# Altium PCB PCBJpepz.PcbDoc
Units mm, origin at the board's own origin, x right, y up, seen from the top; angles counter-clockwise.
Board outline 100 x 100 mm, 2 copper layers (Top Layer, Bottom Layer); 252 components, 165 nets, 710 pads, 0 vias.
Unrouted connection lines stored in the file: 471.
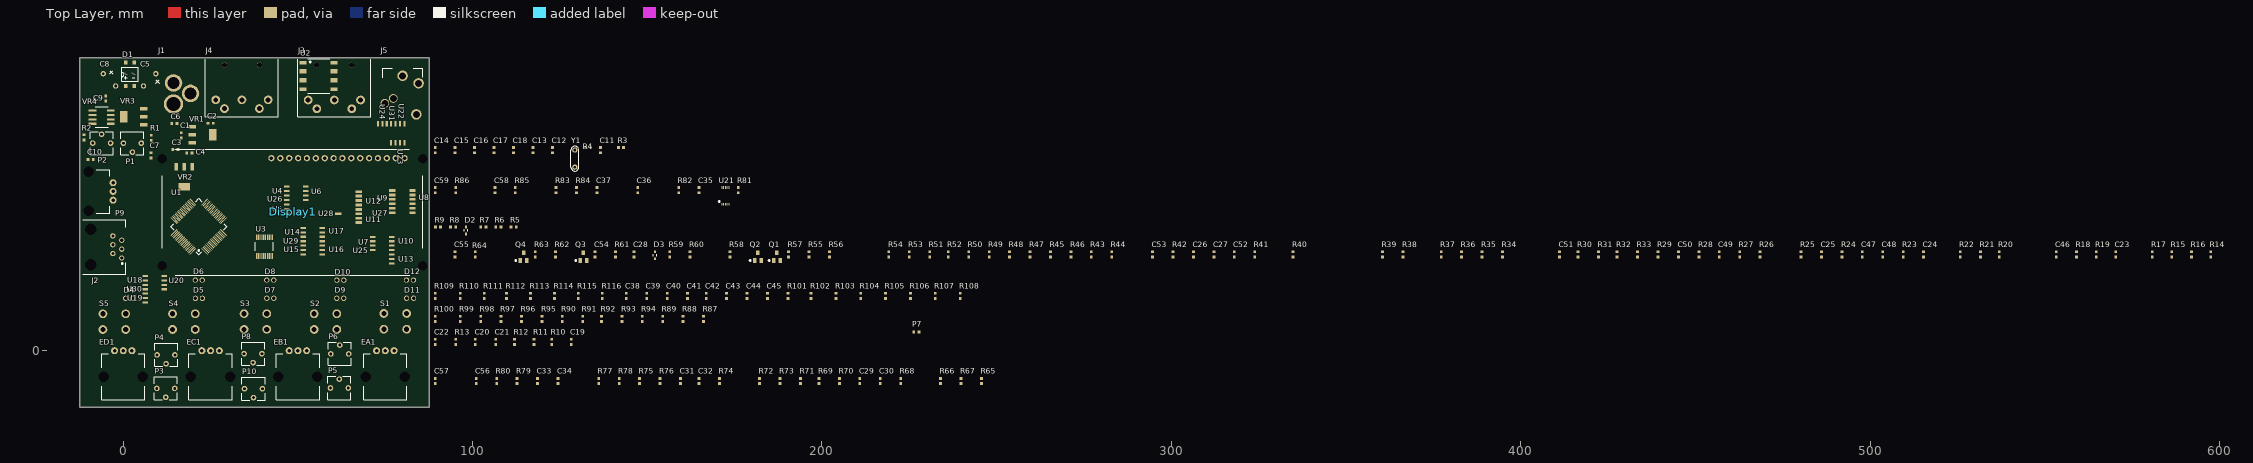
[diagram p0: Top Layer view]
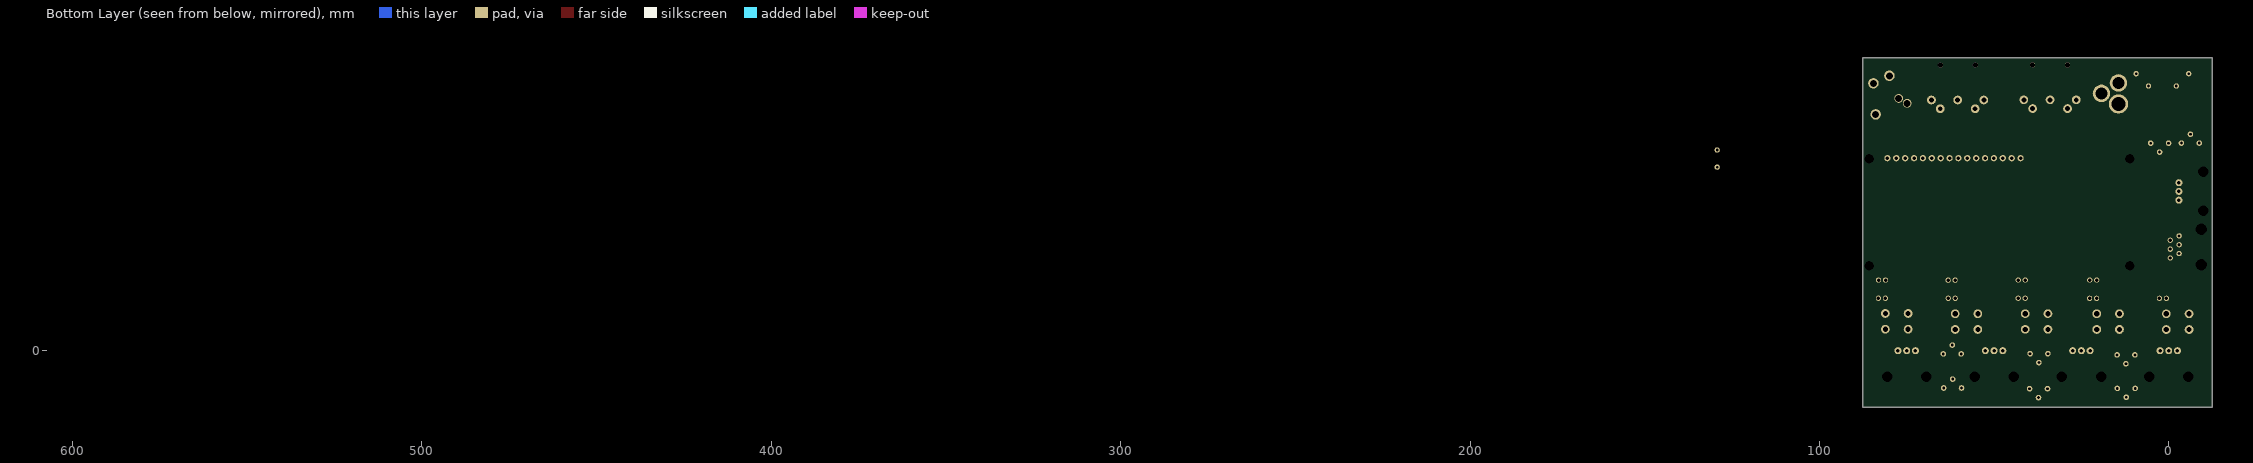
[diagram p1: Bottom Layer view, seen from below]

## Layer stack, top to bottom
Top Solder: solder mask 0.0102, Solder Resist, Dk 3.5
Top Layer: signal copper 0.0356
Dielectric 1: dielectric 0.32, FR-4, Dk 4.8
Bottom Layer: signal copper 0.0356
Bottom Solder: solder mask 0.0102, Solder Resist, Dk 3.5

## Board outline
-12.45,-16.15 -12.45,83.85 87.55,83.85 87.55,-16.15

## Design rules (kind name [scope] priority, off if disabled: settings)
Clearance [All] p1: gap=0.254
PolygonConnect [All] p1: connectstyle=Relief reliefconductorwidth=0.254 reliefentries=4 polygonreliefangle="90 Angle" airgapwidth=0.254
RoutingVias [All] p1: holewidth=0.711 width=1.27 viastyle="Through Hole" minholewidth=0.711 minwidth=1.27 maxholewidth=0.711 maxwidth=1.27
SolderMaskExpansion [All] p1: expansion=0.102
UnpouredPolygon [All] p1: allowunpoured=FALSE
Width [All] p1: maxlimit=0.254 minlimit=0.254 preferedwidth=0.254
29 further rules are at their usual default settings.

## Components (designator, comment, footprint, x,y, rotation, side; value= is the part's Value field where it differs from the comment)
C1 "10uF" CAPC1608N 16.375,63.2 r270 top
C2 "100uF" CAPC1608N 23.45,64.875 r0 top
C3 "10uF" CAPC1608N 13.35,57.4 r0 top
C4 "100uF" CAPC1608N 20.525,56.8 r180 top
C5 "2200uF" "Condo electro 13" 7.575,77.525 r225 top
C6 "10uF" CAPC1608N 16.225,65.25 r180 top
C7 "100uF" CAPC1608N 7.7,57.475 r270 top
C8 "2200uF" "Condo electro 13" -3.95,77.525 r315 top
C9 "10uF" CAPC1608N -5.225,73.775 r270 top
C10 "100uF" CAPC1608N -10.9,54.55 r0 top
C11 "20pF" CAPC1608N 136.832,55.829 r90 top
C12 "20pF" CAPC1608N 123.107,55.829 r90 top
C13 "10uF" CAPC1608N 117.506,55.829 r90 top
C14 "0.1uF" CAPC1608N 89.53,55.829 r90 top
C15 "0.1uF" CAPC1608N 95.13,55.829 r90 top
C16 "0.1uF" CAPC1608N 100.731,55.829 r90 top
C17 "0.1uF" CAPC1608N 106.306,55.829 r90 top
C18 "0.1uF" CAPC1608N 111.906,55.829 r90 top
C19 "10uF" CAPC1608N 128.432,0.951 r90 top
C20 "10uF" CAPC1608N 100.981,0.951 r90 top
C21 "10uF" CAPC1608N 106.831,0.951 r90 top
C22 "0.1uF" CAPC1608N 89.53,0.951 r90 top
C23 "0.1uF" CAPC1608N 570.503,26.002 r90 top
C24 "0.1uF" CAPC1608N 515.501,26.002 r90 top
C25 "22pF" CAPC1608N 486.274,26.002 r90 top
C26 "220pF" CAPC1608N 306.541,26.002 r90 top
C27 "220pF" CAPC1608N 312.366,26.002 r90 top
C28 "100pF" CAPC1608N 146.433,26.002 r90 top
C29 "10uF" CAPC1608N 211.036,-10.25 r90 top
C30 "10uF" CAPC1608N 216.886,-10.25 r90 top
C31 "10uF" CAPC1608N 159.708,-10.25 r90 top
C32 "10uF" CAPC1608N 165.034,-10.25 r90 top
C33 "10uF" CAPC1608N 118.781,-10.25 r90 top
C34 "10uF" CAPC1608N 124.632,-10.25 r90 top
C35 "47pF" CAPC1608N 165.034,44.353 r90 top
C36 "4.7uF" CAPC1608N 147.483,44.353 r90 top
C37 "4.7uF" CAPC1608N 135.807,44.353 r90 top
C38 "Cap" CAPC1608N 144.183,14.101 r90 top
C39 "Cap" CAPC1608N 150.033,14.101 r90 top
C40 "Cap" CAPC1608N 155.883,14.101 r90 top
C41 "Cap" CAPC1608N 161.733,14.101 r90 top
C42 "Cap" CAPC1608N 167.059,14.101 r90 top
C43 "Cap" CAPC1608N 172.909,14.101 r90 top
C44 "Cap" CAPC1608N 178.759,14.101 r90 top
C45 "Cap" CAPC1608N 184.61,14.101 r90 top
C46 "5uF" CAPC1608N 553.478,26.002 r90 top
C47 "5uF" CAPC1608N 497.975,26.002 r90 top
C48 "5uF" CAPC1608N 503.825,26.002 r90 top
C49 "5uF" CAPC1608N 457.048,26.002 r90 top
C50 "5uF" CAPC1608N 445.347,26.002 r90 top
C51 "5uF" CAPC1608N 411.271,26.002 r90 top
C52 "5uF" CAPC1608N 318.216,26.002 r90 top
C53 "5uF" CAPC1608N 294.84,26.002 r90 top
C54 "5uF" CAPC1608N 135.232,26.002 r90 top
C55 "5uF" CAPC1608N 95.13,26.002 r90 top
C56 "5uF" CAPC1608N 101.231,-10.25 r90 top
C57 "5uF" CAPC1608N 89.53,-10.25 r90 top
C58 "5uF" CAPC1608N 106.581,44.353 r90 top
C59 "5uF" CAPC1608N 89.53,44.353 r90 top
D1 "MB8S" MB8S 1.954,75.734 r0 top
D2 "1N914" 1N914 99.005,32.027 r0 top
D3 "1N914" 1N914 153.108,24.927 r0 top
D4 "LED0" LED -0.6,14.1 r0 top
D5 "LED1" LED 19.375,14.1 r0 top
D6 "LED2" LED 19.35,19.325 r0 top
D7 "LED3" LED 39.825,14.125 r0 top
D8 "LED4" LED 39.8,19.325 r0 top
D9 "LED5" LED 59.85,14.1 r0 top
D10 "LED6" LED 59.875,19.3 r0 top
D11 "LED7" LED 79.825,14.125 r0 top
D12 "LED8" LED 79.8,19.325 r0 top
Display1 "16x2 LCD" Display 6.1,16.625 r0 top
EA1 "EC12E" EC12E 75,0 r180 top
EB1 "EC12E" EC12E 50,0 r180 top
EC1 "EC12E" EC12E 25,0 r180 top
ED1 "EC12E" EC12E 0,0 r180 top
J1 "12V AC IN" "NEB 21 R" 21.3,67.175 r90 top
J2 "Program/Debug" RJ11 2.825,18.5 r90 top
J3 "Midi IN" "SOCKET MIDI" 42,66.675 r0 top
J4 "Midi THRU" "SOCKET MIDI" 15.55,66.725 r0 top
J5 "Audio Out" "1503 09" 70.3,66.625 r0 top
P1 "9V ADJ" "BOURNS Trim pot" 2.625,59.4 r0 top
P2 "-9V ADJ" "BOURNS Trim pot" -6.201,59.423 r180 top
P3 "Initial Reso" "BOURNS Trim pot" 12.175,-10.775 r0 top
P4 "V/Oct Trim" "BOURNS Trim pot" 12.25,-1.2 r0 top
P5 "Initial Freq" "BOURNS Trim pot" 61.85,-10.675 r180 top
P6 "Hi compensate" "BOURNS Trim pot" 61.95,-0.925 r180 top
P7 "Mod amount" CAPC1608N 225.4,5.175 r0 top
P8 "Output trim" "BOURNS Trim pot" 37.15,-0.85 r0 top
P9 "Volume" "ALPS Potentiometer" -9.375,45.2 r90 top
P10 "1K lin" "BOURNS Trim pot" 37.275,-10.875 r0 top
Q1 "2N3906" 2N3906 181.834,22.777 r0 top
Q2 "2N3906" 2N3906 176.384,22.777 r0 top
Q3 "2N3904" 2N3906 126.457,22.777 r0 top
Q4 "2N3904" 2N3906 109.306,22.777 r0 top
R1 "120" CAPC1608N 7.825,62.525 r270 top
R2 "240" CAPC1608N -11.05,59.45 r90 top
R3 "10k" CAPC1608N 140.882,57.954 r0 top
R4 "10" CAPC1608N 131.457,57.954 r0 top
R5 "Res1" CAPC1608N 110.131,35.228 r0 top
R6 "Res1" CAPC1608N 105.806,35.228 r0 top
R7 "330" CAPC1608N 101.481,35.228 r0 top
R8 "Res1" CAPC1608N 92.83,35.228 r0 top
R9 "1k" CAPC1608N 88.505,35.228 r0 top
R10 "100" CAPC1608N 122.832,0.951 r90 top
R11 "100" CAPC1608N 117.756,0.951 r90 top
R12 "100" CAPC1608N 112.156,0.951 r90 top
R13 "100" CAPC1608N 95.38,0.951 r90 top
R14 "300k" CAPC1608N 597.73,26.002 r90 top
R15 "2k" CAPC1608N 586.554,26.002 r90 top
R16 "2k" CAPC1608N 592.154,26.002 r90 top
R17 "200k" CAPC1608N 580.954,26.002 r90 top
R18 "100k" CAPC1608N 559.303,26.002 r90 top
R19 "100k" CAPC1608N 564.903,26.002 r90 top
R20 "49.9k" CAPC1608N 537.152,26.002 r90 top
R21 "150k" CAPC1608N 531.827,26.002 r90 top
R22 "4.7M" CAPC1608N 525.976,26.002 r90 top
R23 "2k" CAPC1608N 509.675,26.002 r90 top
R24 "180k" CAPC1608N 492.125,26.002 r90 top
R25 "4.7M" CAPC1608N 480.424,26.002 r90 top
R26 "150k" CAPC1608N 468.723,26.002 r90 top
R27 "39k" CAPC1608N 462.898,26.002 r90 top
R28 "300k" CAPC1608N 451.198,26.002 r90 top
R29 "49.9k" CAPC1608N 439.497,26.002 r90 top
R30 "39k" CAPC1608N 416.621,26.002 r90 top
R31 "100" CAPC1608N 422.471,26.002 r90 top
R32 "100" CAPC1608N 427.796,26.002 r90 top
R33 "43k" CAPC1608N 433.647,26.002 r90 top
R34 "150k" CAPC1608N 394.97,26.002 r90 top
R35 "30k" CAPC1608N 389.12,26.002 r90 top
R36 "100k" CAPC1608N 383.269,26.002 r90 top
R37 "100k" CAPC1608N 377.444,26.002 r90 top
R38 "20k" CAPC1608N 366.493,26.002 r90 top
R39 "20k" CAPC1608N 360.643,26.002 r90 top
R40 "4.7k" CAPC1608N 334.992,26.002 r90 top
R41 "100" CAPC1608N 324.066,26.002 r90 top
R42 "30k" CAPC1608N 300.69,26.002 r90 top
R43 "50k" CAPC1608N 277.289,26.002 r90 top
R44 "50k" CAPC1608N 283.139,26.002 r90 top
R45 "100k" CAPC1608N 265.614,26.002 r90 top
R46 "120k" CAPC1608N 271.439,26.002 r90 top
R47 "30k" CAPC1608N 259.763,26.002 r90 top
R48 "100k" CAPC1608N 253.913,26.002 r90 top
R49 "100k" CAPC1608N 248.063,26.002 r90 top
R50 "100k" CAPC1608N 242.212,26.002 r90 top
R51 "7.5k" CAPC1608N 231.037,26.002 r90 top
R52 "7.5k" CAPC1608N 236.362,26.002 r90 top
R53 "2k" CAPC1608N 225.187,26.002 r90 top
R54 "100k" CAPC1608N 219.336,26.002 r90 top
R55 "100k" CAPC1608N 196.46,26.002 r90 top
R56 "30k" CAPC1608N 202.31,26.002 r90 top
R57 "1M" CAPC1608N 190.61,26.002 r90 top
R58 "100k" CAPC1608N 173.884,26.002 r90 top
R59 "33k" CAPC1608N 156.608,26.002 r90 top
R60 "33k" CAPC1608N 162.459,26.002 r90 top
R61 "10k" CAPC1608N 141.082,26.002 r90 top
R62 "100k" CAPC1608N 123.957,26.002 r90 top
R63 "475" CAPC1608N 118.106,26.002 r90 top
R64 "10k" CAPC1608N 100.981,26.002 r90 top
R65 "18K" CAPC1608N 245.863,-10.25 r90 top
R66 "2k" CAPC1608N 234.162,-10.25 r90 top
R67 "2k" CAPC1608N 240.012,-10.25 r90 top
R68 "3.3k" CAPC1608N 222.736,-10.25 r90 top
R69 "10k" CAPC1608N 199.36,-10.25 r90 top
R70 "10k" CAPC1608N 205.186,-10.25 r90 top
R71 "18K" CAPC1608N 194.01,-10.25 r90 top
R72 "2k" CAPC1608N 182.309,-10.25 r90 top
R73 "2k" CAPC1608N 188.16,-10.25 r90 top
R74 "3.3k" CAPC1608N 170.884,-10.25 r90 top
R75 "10k" CAPC1608N 148.008,-10.25 r90 top
R76 "10k" CAPC1608N 153.858,-10.25 r90 top
R77 "2k" CAPC1608N 136.307,-10.25 r90 top
R78 "2k" CAPC1608N 142.158,-10.25 r90 top
R79 "10k" CAPC1608N 112.931,-10.25 r90 top
R80 "10k" CAPC1608N 107.081,-10.25 r90 top
R81 "50k" CAPC1608N 176.209,44.353 r90 top
R82 "10k" CAPC1608N 159.183,44.353 r90 top
R83 "330" CAPC1608N 124.107,44.353 r90 top
R84 "5k" CAPC1608N 129.957,44.353 r90 top
R85 "10k" CAPC1608N 112.431,44.353 r90 top
R86 "10k" CAPC1608N 95.38,44.353 r90 top
R87 "220" CAPC1608N 166.309,7.526 r90 top
R88 "220" CAPC1608N 160.458,7.526 r90 top
R89 "220" CAPC1608N 154.608,7.526 r90 top
R90 "10K" CAPC1608N 125.882,7.526 r90 top
R91 "10K" CAPC1608N 131.732,7.526 r90 top
R92 "10K" CAPC1608N 137.082,7.526 r90 top
R93 "10K" CAPC1608N 142.933,7.526 r90 top
R94 "10K" CAPC1608N 148.758,7.526 r90 top
R95 "220" CAPC1608N 120.031,7.526 r90 top
R96 "220" CAPC1608N 114.206,7.526 r90 top
R97 "220" CAPC1608N 108.356,7.526 r90 top
R98 "220" CAPC1608N 102.506,7.526 r90 top
R99 "220" CAPC1608N 96.655,7.526 r90 top
R100 "220" CAPC1608N 89.53,7.526 r90 top
R101 "10K" CAPC1608N 190.46,14.101 r90 top
R102 "10K" CAPC1608N 197.06,14.101 r90 top
R103 "10K" CAPC1608N 204.186,14.101 r90 top
R104 "10K" CAPC1608N 211.286,14.101 r90 top
R105 "10K" CAPC1608N 218.411,14.101 r90 top
R106 "10K" CAPC1608N 225.537,14.101 r90 top
R107 "10K" CAPC1608N 232.637,14.101 r90 top
R108 "10K" CAPC1608N 239.762,14.101 r90 top
R109 "330" CAPC1608N 89.53,14.101 r90 top
R110 "330" CAPC1608N 96.655,14.101 r90 top
R111 "330" CAPC1608N 103.506,14.101 r90 top
R112 "330" CAPC1608N 109.881,14.101 r90 top
R113 "330" CAPC1608N 116.731,14.101 r90 top
R114 "330" CAPC1608N 123.607,14.101 r90 top
R115 "330" CAPC1608N 130.457,14.101 r90 top
R116 "330" CAPC1608N 137.332,14.101 r90 top
S1 "BUT0" "PUSH BUTTON" 72.7,4.125 r0 top
S2 "BUT1" "PUSH BUTTON" 52.725,4.05 r0 top
S3 "BUT2" "PUSH BUTTON" 32.675,4.075 r0 top
S4 "BUT3" "PUSH BUTTON" 12.2,4.05 r0 top
S5 "BUT4" "PUSH BUTTON" -7.725,4.025 r0 top
U1 "PIC32MX575F512H" PIC32 21.6,27.45 r135 top
U2 "6N139" 6N139 49.95,83.625 r270 top
U3 "PCM1781" PCM1781 40.825,31.1 r0 top
U4 "TL084" TL084_3PADS 47.791,42.246 r90 top
U5 "TL084" TL084_3PADS 47.791,37.166 r90 top
U6 "TL084" TL084_3PADS 53.191,42.246 r90 top
U7 "TL084" TL084_3PADS 72.465,27.902 r90 top
U8 "LM13700" LM13700_5PADS 80.135,42.056 r90 top
U9 "LM13700" LM13700_5PADS 74.335,42.056 r90 top
U10 "TL084" TL084_3PADS 77.865,27.902 r90 top
U11 "LM13700" LM13700_2PADS 70.044,36.671 r270 top
U12 "LM13700" LM13700_5PADS 64.71,41.715 r90 top
U13 "TL084" TL084_3PADS 77.865,22.822 r90 top
U14 "TL084" TL084_3PADS 52.561,30.452 r90 top
U15 "TL084" TL084_3PADS 52.561,25.372 r90 top
U16 "TL084" TL084_3PADS 57.961,25.372 r90 top
U17 "TL084" TL084_3PADS 57.961,30.452 r90 top
U18 "TL084" TL084_3PADS 7.35,16.7 r90 top
U19 "TL084" TL084_3PADS 7.35,11.62 r90 top
U20 "TL084" TL084_3PADS 12.75,16.7 r90 top
U21 "ADG704" ADG704 169.684,40.253 r0 top
U22 "TL084" TL084_3PADS 75.8,63.9 r0 top
U23 "TL084" TL084_3PADS 75.8,58.5 r0 top
U24 "TL084" TL084_3PADS 70.72,63.9 r0 top
U25 "TL084" TL084_ALIM 75.325,24.6 r90 top
U26 "TL084" TL084_ALIM 50.651,38.944 r90 top
U27 "LM13700" LM13700_ALIM 82.675,37.23 r90 top
U28 "LM13700" LM13700_ALIM 67.25,36.925 r90 top
U29 "TL084" TL084_ALIM 55.421,27.15 r90 top
U30 "TL084" TL084_ALIM 10.21,13.398 r90 top
U31 "TL084" TL084_ALIM 72.498,61.04 r0 top
VR1 "LM1117-3.3" LM1117-SOT 25.592,61.849 r270 top
VR2 "LM1117-5.0" LM1117-SOT 17.475,46.9 r180 top
VR3 "LM1117-ADJ" LM1117-SOT 0.075,66.975 r90 top
VR4 "LM337L" LM337L -3.6,67.5 r270 top
Y1 "12.288 MHz" Xtal 129.257,52.553 r90 top

## Footprints (in the part's own frame and the unit in brackets; to place one, negate y for a bottom-side part, rotate by r counter-clockwise, add the part's x,y. Pads: shape width x height; smd on the part's side, far side on the other; paste and mask are expansions set on the pad)
1N914 [mm] "Diode"
  rect 0.5x0.8 smd: 1(-0.889,3.396) 2(-0.889,1.396)
  silkscreen extent -1.4,2.16 -0.38,2.67
2N3906 [mm]
  rect 1x1.4 smd: 1(6.218,3.048) 2(4.318,3.048) 3(5.268,5.248)
  silkscreen extent 2.85,2.85 3.25,3.25
6N139 [mil] "Optocoupleur"
  rect 40x78.74 smd: 1(45,60) 4(345,60) 5(345,409.13) 8(45,409.13)
  rect 50x78.74 smd: 2(145,60) 3(245,60) 6(245,409.13) 7(145,409.13)
  silkscreen extent 0,110 390,360
"1503 09" [mm] "Fiche JACK"
  round 3 hole 2 unplated: 1(9.652,12.065) 2(14.224,9.906) 4(13.589,1.016)
  round 2.5 hole 2 unplated: 3(4.572,4.191) 5(6.985,5.588)
  silkscreen extent 3.95,11.57 15.45,14.17
ADG704 [mm] "Multiplexeur"
  rect 0.3x0.8 smd mask+0.05: 1(1.651,1.651) 2(2.151,1.651) 3(2.659,1.651) 4(3.159,1.651) 5(3.675,1.651) 6(3.675,6.498) 7(3.159,6.498) 8(2.659,6.498) 9(2.151,6.498) 10(1.651,6.498)
  silkscreen extent 0.69,2.21 1.09,2.61
"ALPS Potentiometer" [mm] "Encodeur"
  round 0 hole 3 mask+0: 0(-5.207,0.531) 0(6.005,0.531)
  round 2 hole 1 mask+0: 1(2.877,-6.469) 2(-2.123,-6.469) 3(0.377,-6.469)
  silkscreen extent -5.82,-5.58 6.58,-1.64
"BOURNS Trim pot" [mm]
  round 1.6 hole 0.8: 1(-2.57,0) 2(2.54,0) 3(0,-2.54)
  silkscreen extent -3.3,-3.3 3.3,3.3
CAPC1608N [mm]
  rect 0.8x0.8 smd: 1(0.838,0.203) 2(2.337,0.203)
"Condo electro 13" [mil]
  round 60 hole 30: 1(-98.43,0) 2(98.43,0)
  silkscreen extent -73,50 -23,100
Display [mm]
  round 0 hole 2.7 mask+0: 0(5.073,7.681) 0(5.073,38.288) 0(79.622,7.681) 0(79.622,38.288)
  round 1.8 hole 1: 1(74.422,38.481) 2(71.882,38.481) 3(69.342,38.481) 4(66.802,38.481) 5(64.262,38.481) 6(61.722,38.481) 7(59.182,38.481) 8(56.642,38.481) 9(54.102,38.481) 10(51.562,38.481) 11(49.022,38.481) 12(46.482,38.481) 13(43.942,38.481) 14(41.402,38.481) 15(38.862,38.481) 16(36.322,38.481)
  silkscreen extent 5.08,4.95 79.63,41.08
EC12E [mm] "Encodeur"
  round 0 hole 3 mask+0: 0(-5.584,7.5) 0(5.628,7.493)
  round 2 hole 1 mask+0: 1(2.5,0) 2(-2.5,0) 3(0,0)
  silkscreen extent -6.2,0.89 6.2,14.09
LED [mm]
  round 1.5 hole 1: 1(3.27,0.889) 2(1.27,0.889)
LM337L [mm]
  rect 0.6x2.2 smd mask+0.1: 1(0,0) 1(0,-5.2) 1(1.27,0) 1(1.27,-5.2) 2(2.54,-5.2) 3(-1.27,-5.2) ""(-1.27,0) ""(2.54,0)
  round 0.4 on Top Overlay: ""(-1.524,-3.549)
  silkscreen extent -2.29,-4.44 3.56,-0.75
LM1117-SOT [mm]
  rect 1x2.15 smd: 1(2.3,-5.8) 2(-2.3,-5.8) 3(0,-5.8)
  rect 3.25x2.15 smd: 3(0,0)
LM13700_2PADS [mm]
  rect 0.8x1.8 smd: 1(-1.27,-2.667) 2(0,-2.667)
LM13700_5PADS [mm]
  rect 0.8x1.8 smd: 1(-1.27,-2.667) 2(0,-2.667) 3(1.27,-2.667) 4(2.54,-2.667) 5(3.81,-2.667)
LM13700_ALIM [mm]
  rect 0.8x1.8 smd: 1(2.286,5.673) 2(2.286,-0.127)
MB8S [mm]
  rect 1x1.2 smd: 1(-1.25,6.8) 2(1.25,6.8) 3(1.25,0) 4(-1.25,0)
  silkscreen extent -2.35,1.4 2.35,5.4
"NEB 21 R" [mm] "Fiche Alimentation"
  round 5.5 hole 4 unplated: 1(3.458,6.911)
  round 5 hole 3.5 unplated: 2(6.477,2.032) 3(9.458,6.911)
PCM1781 [mm] "DAC"
  rect 0.4x1.6 smd mask+0.05: 1(-2.667,-4.003) 2(-2.032,-4.003) 3(-1.397,-4.003) 4(-0.762,-4.003) 5(-0.127,-4.003) 6(0.508,-4.003) 7(1.143,-4.003) 8(1.778,-4.003) 9(1.778,1.397) 10(1.143,1.397) 11(0.508,1.397) 12(-0.127,1.397) 13(-0.762,1.397) 14(-1.397,1.397) 15(-2.032,1.397) 16(-2.667,1.397)
  round 0.4 on Top Overlay: 1(-2.413,-2.286)
  silkscreen extent -3.05,-2.54 2.16,0
PIC32 [mm] "PIC32MX575F512H"
  rect 2.5x0.3 smd paste+0 mask+0.05: 1(-0.5,-1.905) 2(-0.5,-2.405) 3(-0.5,-2.913) 4(-0.5,-3.413) 5(-0.5,-3.929) 6(-0.5,-4.429) 7(-0.5,-4.945) 8(-0.5,-5.445) 9(-0.5,-5.961) 10(-0.5,-6.461) 11(-0.5,-6.969) 12(-0.5,-7.469) 13(-0.5,-7.985) 14(-0.5,-8.485) 15(-0.5,-9.001) 16(-0.5,-9.501) 33(11.9,-9.501) 34(11.9,-9.001) 35(11.9,-8.485) 36(11.9,-7.985) 37(11.9,-7.469) 38(11.9,-6.969) 39(11.9,-6.461) 40(11.9,-5.961) 41(11.9,-5.445) 42(11.9,-4.945) 43(11.9,-4.429) 44(11.9,-3.929) 45(11.9,-3.413) 46(11.9,-2.913) 47(11.9,-2.405) 48(11.9,-1.905)
  rect 0.3x2.5 smd paste+0 mask+0.05: 17(1.905,-11.9) 18(2.405,-11.9) 19(2.913,-11.9) 20(3.413,-11.9) 21(3.929,-11.9) 22(4.429,-11.9) 23(4.945,-11.9) 24(5.445,-11.9) 25(5.961,-11.9) 26(6.461,-11.9) 27(6.969,-11.9) 28(7.469,-11.9) 29(7.985,-11.9) 30(8.485,-11.9) 31(9.001,-11.9) 32(9.501,-11.9) 49(9.501,0.5) 50(9.001,0.5) 51(8.485,0.5) 52(7.985,0.5) 53(7.469,0.5) 54(6.969,0.5) 55(6.461,0.5) 56(5.961,0.5) 57(5.445,0.5) 58(4.945,0.5) 59(4.429,0.5) 60(3.929,0.5) 61(3.413,0.5) 62(2.913,0.5) 63(2.405,0.5) 64(1.905,0.5)
  silkscreen extent 0,-11.4 11.4,0
"PUSH BUTTON" [mm]
  round 2.5 hole 1.5: 1(8.405,6.532) 2(1.905,6.532) 3(1.905,2.032) 4(8.405,2.032)
RJ11 [mm] "RJ11 Socket"
  round 0 hole 3.25 mask+0: 0(6.11,12.159) 0(16.27,12.159)
  round 1.5 hole 0.9: 1(8.025,3.269) 2(9.295,5.809) 3(10.565,3.269) 4(11.835,5.809) 5(13.105,3.269) 6(14.375,5.809)
  silkscreen extent 3.34,2.16 19.04,14.35
"SOCKET MIDI" [mm] "Midi"
  round 1.4 hole 1.5 mask+0: 0(13.415,15.08) 0(23.415,15.08)
  round 2.5 hole 1.4: 1(18.415,5.08) 2(10.922,5.08) 3(25.922,5.08) 4(13.415,2.58) 5(23.415,2.58)
  silkscreen extent 7.87,0.25 28.83,16.76
TL084_3PADS [mm] "Ampli-op"
  rect 0.6x1.55 smd: 1(2.159,1.016) 2(3.429,1.016) 3(4.699,1.016)
TL084_ALIM [mm] "Ampli-op"
  rect 0.6x1.55 smd: 1(4.191,3.876) 2(4.191,-1.524)
Xtal [mil]
  round 60 hole 30: 1(0,0) 2(192.13,0)
  silkscreen extent -45,-45 235,45

## Part data
C1 C2 C3 C4 C6 C7 C9 C10: library part Cap2, "Capacitor"
C5 C8 C19 C20 C21: library part "Cap Pol1", "Polarized Capacitor (Radial)"
C11 C12 C14 C15 C16 C17 C18 C22 C23 C24 C25 C26 C27 C28 C29 C30 C31 C32 C33 C34 C35 C36 C37 C46 C47 C48 C49 C50 C51 C52 C53 C54 C55 C56 C57 C58 C59: library part "Cap Semi", "Capacitor (Semiconductor SIM Model)"
C13: library part Cap, "Capacitor"
C38 C39 C40 C41 C42 C43 C44 C45: "Capacitor"
D1: library part Bridge1, "Full Wave Diode Bridge"
D2: library part Diode, "Default Diode"
D3: library part "Diode 1N4001", "1 Amp General Purpose Rectifier"
D4: "Typical INFRARED GaAs LED"
D5 D6 D7 D8 D9 D10 D11 D12: library part LED0, "Typical INFRARED GaAs LED"
Display1: library part Display
J1: library part "Header 3", "Header, 3-Pin"
J2: library part "Header 6H", "Header, 6-Pin, Right Angle"
J3 J4: library part "Header 5", "DIN 5 Pins"
J5: library part "Phonejack Stereo SW", "3-Conductor Jack with 2 break contacts (normals) and 2 auxiliary make contacts"
P1 P2 P3 P4 P5 P6 P8 P9 P10: library part RPot, "Potentiometer"
P7: library part "Res Adj1", "Variable Resistor"
Q1 Q2: "PNP General Purpose Amplifier"
Q3 Q4: "NPN General Purpose Amplifier"
R1 R2 R10 R11 R12 R13 R14 R15 R16 R17 R18 R19 R20 R21 R22 R23 R24 R25 R26 R27 R28 R29 R30 R31 R32 R33 R34 R35 R36 R37 R38 R39 R40 R41 R42 R43 R44 R45 R46 R47 R48 R49 R50 R51 R52 R53 R54 R55 R56 R57 R58 R59 R60 R61 R62 R63 R64 R65 R66 R67 R68 R69 R70 R71 R72 R73 R74 R75 R76 R77 R78 R79 R80 R81 R82 R83 R84 R85 R86: library part Res3, "Resistor"
R3 R4 R7 R9 R87 R88 R89 R90 R91 R92 R93 R94 R95 R96 R97 R98 R99 R100 R101 R102 R103 R104 R105 R106 R107 R108 R109 R110 R111 R112 R113 R114 R115 R116: library part Res1, "Resistor"
R5 R6 R8: "Resistor"
S1 S2 S3 S4 S5: library part SW-PB, "Switch"
U1: library part "PIC32 MX575F512H"
U2: library part Optocoupleur
U3: library part "PCM1781 DAC"
U8 U9 U12: library part LM13700_2
U11: library part LM13700_1
U25 U26 U29 U30 U31: library part TL_CLEAN
VR1 VR2 VR3 VR4: library part "Volt Reg", "Voltage Regulator"
Y1: library part XTAL, "Crystal Oscillator"

## Nets (pads, with @x,y where several pads share a name; then routed paths per layer and width w, separated by ;. In a path a pad name is that pad's centre, name@x,y a point inside that pad or via, vN(x,y) a via of type N, cw(c..) or ccw(c..) an arc to the next point about the centre after c; other vN are vias at no path point)
3,3V: C14.2 C15.2 C16.2 C17.2 C18.2 J2.2 R3.2 R4.1 R4.2 U1.10 U1.19 U1.26 U1.38 U1.57
+3.3V: C2.1 R90.2 R91.2 R92.2 R93.2 R94.2 VR1.3
+5V: C4.1 C21.1 C22.2 Display1.2 Display1.16 P10.2 R5.2 R7.2 U2.8 U3.11 U21.5 U21.6 VR2.3
+9V: C7.1 C46.1 C47.1 C50.1 C52.1 C54.1 C56.1 C58.1 R1.2 R38.1 R39.1 R44.2 R57.1 R60.2 U25.2 U26.2 U27.1 U28.1 U29.2 U30.2 U31.2 VR3.3
-9V: C10.2 C48.2 C49.2 C51.2 C53.2 C55.2 C57.2 C59.2 R2.1 R30.2 R33.2 R40.1 R43.1 R55.1 R59.1 R65.1 R71.1 U25.1 U26.1 U29.1 U30.1 U31.1 VR4.3
GND: C1.2 C2.2 C3.2 C4.2 C5.2 C6.2 C7.2 C8.1 C9.1 C10.1 C11.1 C12.1 C13.1 C14.1 C15.1 C16.1 C17.1 C18.1 C26.1 C27.1 C29.1 C30.1 C31.1 C32.1 C33.1 C34.1 C38.1 C39.1 C40.1 C41.1 C42.1 C43.1 C44.1 C45.1 C46.2 C47.2 C48.1 C49.1 C50.2 C51.1 C52.2 C53.1 C54.2 C55.1 C56.2 C57.1 C58.2 C59.1 D4.2 D5.2 D6.2 D7.2 D8.2 D9.2 D10.2 D11.2 D12.2 Display1.1 Display1.5 EA1.3 EB1.3 EC1.3 ED1.3 J1.2 J2.3 J4.2 J5.1 P1.1 P1.3 P2.2 P2.3 P9.1 Q1.1 Q2.1 Q3.2 R9.1 R22.2 R24.2 R25.2 R27.2 R31.2 R32.2 R41.2 R42.2 R56.2 R63.2 R69.2 R75.2 R80.2 R86.2 S1.2 S2.2 S3.2 S4.2 S5.2 U1.9 U1.20 U1.25 U1.41 U2.5 U5.2 U7.3 U8.3 U9.3 U12.3 U14.3 U16.3 U17.3 U21.3 U22.2 U23.2 VR1.2 VR2.2
NetC1_1: C1.1 C3.1 C5.1 C6.1 D1.4 VR1.1 VR2.1 VR3.1
NetC8_2: C8.2 C9.2 D1.3 VR4.1
NetC11_2: C11.2 U1.40 Y1.2
NetC12_2: C12.2 U1.39 Y1.1
NetC13_2: C13.2 U1.56
NetC19_1: C19.1 U3.15
NetC19_2: C19.2 R17.1 U21.2
NetC20_1: C20.1 U3.13
NetC23_1: C23.1 R19.2 R36.2 U13.1 U13.2
NetC23_2: C23.2 R22.1 U4.3
NetC24_1: C24.1 R20.2 R37.1 U10.1 U10.2
NetC24_2: C24.2 R25.1 U6.3
NetC25_1: C25.1 R21.1 R24.1 U4.2
NetC25_2: C25.2 R16.1 R21.2 R29.2 U4.1
NetC26_2: C26.2 U9.5 U10.3
NetC27_2: C27.2 U8.5 U13.3
NetC28_1: C28.1 Q4.3 R57.2 U17.2
NetC28_2: C28.2 P6.2 P6.3 R64.1 U17.1
NetC29_2: C29.2 R66.2 R67.1
NetC30_2: C30.2 R67.2 R68.1
NetC31_2: C31.2 R72.2 R73.1
NetC32_2: C32.2 R73.2 R74.1
NetC33_2: C33.2 R77.2 R78.1
NetC34_2: C34.2 R78.2 U20.3
NetC35_1: C35.1 C36.2 P8.1 U22.3
NetC35_2: C35.2 R83.2 U22.1
NetC36_1: C36.1 P9.3
NetC37_1: C37.1 R81.1 R83.1
NetC37_2: C37.2 R84.1 U24.3
NetC38_2: C38.2 EA1.2 R101.2 R109.2
NetC39_2: C39.2 EA1.1 R102.1 R110.2
NetC40_2: C40.2 EB1.2 R103.2 R111.2
NetC41_2: C41.2 EB1.1 R104.1 R112.2
NetC42_2: C42.2 EC1.2 R105.2 R113.2
NetC43_2: C43.2 EC1.1 R106.1 R114.2
NetC44_2: C44.2 ED1.2 R107.2 R115.2
NetC45_2: C45.2 ED1.1 R108.1 R116.2
NetD1_1: D1.1 J1.1
NetD1_2: D1.2 J1.3
NetD2_1: D2.1 J3.5 U2.3
NetD2_2: D2.2 R6.2 U2.2
NetD3_1: D3.1 P4.3 Q4.2
NetD3_2: D3.2 R61.2
NetD4_1: D4.1 R87.2
NetD5_1: D5.1 R88.2
NetD6_1: D6.1 R89.2
NetD7_1: D7.1 R95.2
NetD8_1: D8.1 R96.2
NetD9_1: D9.1 R97.2
NetD10_1: D10.1 R98.2
NetD11_1: D11.1 R99.2
NetD12_1: D12.1 R100.2
NetDisplay1_3: Display1.3 P10.3
NetDisplay1_4: Display1.4 U1.29
NetDisplay1_6: Display1.6 U1.30
NetDisplay1_7: Display1.7 U1.23
NetDisplay1_8: Display1.8 U1.24
NetDisplay1_9: Display1.9 U1.27
NetDisplay1_10: Display1.10 U1.28
NetDisplay1_15: Display1.15 P10.1
NetJ2_1: J2.1 R3.1 U1.7
NetJ2_4: J2.4 U1.16
NetJ2_5: J2.5 U1.15
NetJ3_4: J3.4 R6.1
NetJ4_4: J4.4 R5.1
NetJ4_5: J4.5 R8.1
NetJ5_2: J5.2 R85.1 U24.1
NetJ5_4: J5.4 R82.2 U23.1
NetP1_2: P1.2 R1.1 VR3.2
NetP2_1: P2.1 R2.2 VR4.2
NetP3_1: P3.1 R44.1
NetP3_2: P3.2 R43.2
NetP3_3: P3.3 R45.1
NetP4_1: P4.1 R53.2 U16.1
NetP4_2: P4.2 R63.1
NetP5_1: P5.1 R60.1
NetP5_2: P5.2 R59.2
NetP5_3: P5.3 R62.1
NetP6_1: P6.1 R61.1
NetP7_1: P7.1 R80.1
NetP7_2: P7.2 R79.2 U20.2
NetP8_2: P8.2 P8.3 R81.2
NetP9_2: P9.2 U21.8
NetQ1_2: Q1.2 Q2.2 Q3.3
NetQ1_3: Q1.3 R51.1
NetQ2_3: Q2.3 R52.1
NetQ3_1: Q3.1 Q4.1 R64.2
NetR7_1: R7.1 R8.2 U1.21 U2.6
NetR9_2: R9.2 U2.7
NetR10_1: R10.1 U1.51
NetR10_2: R10.2 U3.5
NetR11_1: R11.1 U1.6
NetR11_2: R11.2 U3.6
NetR12_1: R12.1 U1.4
NetR12_2: R12.2 U3.7
NetR13_1: R13.1 U1.52
NetR13_2: R13.2 U3.8
NetR14_1: R14.1 R17.2 R20.1 U5.3
NetR14_2: R14.2 R15.1 R18.1 U5.1
NetR15_2: R15.2 U21.9
NetR16_2: R16.2 U21.7
NetR18_2: R18.2 R19.1 R32.1 R33.1 R34.1 U8.4
NetR23_1: R23.1 R26.2 U6.1
NetR23_2: R23.2 U21.4
NetR26_1: R26.1 R27.1 U6.2
NetR28_1: R28.1 R29.1 U7.2
NetR28_2: R28.2 R35.1 U7.1
NetR30_1: R30.1 R31.1 R36.1 R37.2 U9.4
NetR34_2: R34.2 R40.2 U11.2
NetR35_2: R35.2 R41.1 U12.4
NetR38_2: R38.2 U8.2
NetR39_2: R39.2 U9.2
NetR42_1: R42.1 U11.1 U12.5
NetR45_2: R45.2 R46.1 R49.2 U14.2
NetR46_2: R46.2 R50.1 U14.1
NetR47_1: R47.1 U12.1
NetR47_2: R47.2 R48.2 U15.1
NetR48_1: R48.1 R50.2 U15.2
NetR49_1: R49.1 R76.1 U19.1
NetR51_2: R51.2 U9.1
NetR52_2: R52.2 U8.1
NetR53_1: R53.1 R54.2 R58.2 R62.2 U16.2
NetR54_1: R54.1 R79.1 U20.1
NetR55_2: R55.2 R56.1 U15.3
NetR58_1: R58.1 R70.1 U18.1
NetR65_2: R65.2 R68.2 U18.3
NetR66_1: R66.1 U1.46
NetR69_1: R69.1 R70.2 U18.2
NetR71_2: R71.2 R74.2 U19.3
NetR72_1: R72.1 U1.49
NetR75_1: R75.1 R76.2 U19.2
NetR77_1: R77.1 U1.50
NetR82_1: R82.1 R84.2 U23.3
NetR85_2: R85.2 R86.1 U24.2
NetR87_1: R87.1 U1.53
NetR88_1: R88.1 U1.54
NetR89_1: R89.1 U1.55
NetR90_1: R90.1 S5.1 U1.18
NetR91_1: R91.1 S4.1 U1.11
NetR92_1: R92.1 S3.1 U1.1
NetR93_1: R93.1 S2.1 U1.60
NetR94_1: R94.1 S1.1 U1.59
NetR95_1: R95.1 U1.58
NetR96_1: R96.1 U1.2
NetR97_1: R97.1 U1.3
NetR98_1: R98.1 U1.5
NetR99_1: R99.1 U1.8
NetR100_1: R100.1 U1.22
NetR109_1: R109.1 U1.61
NetR110_1: R110.1 U1.62
NetR111_1: R111.1 U1.63
NetR112_1: R112.1 U1.64
NetR113_1: R113.1 U1.12
NetR114_1: R114.1 U1.13
NetR115_1: R115.1 U1.14
NetR116_1: R116.1 U1.17
NetU1_47: U1.47 U21.10
NetU1_48: U1.48 U21.1
VCC: R101.1 R102.2 R103.1 R104.2 R105.1 R106.2 R107.1 R108.2
pads on no net: C20.2 C21.2 C22.1 Display1.0 Display1.11 Display1.12 Display1.13 Display1.14 EA1.0 EB1.0 EC1.0 ED1.0 J2.0 J2.6 J3.0 J3.1 J3.2 J3.3 J4.0 J4.1 J4.3 J5.3 J5.5 P9.0 S1.3 S1.4 S2.3 S2.4 S3.3 S3.4 S4.3 S4.4 S5.3 S5.4 U1.31 U1.32 U1.33 U1.34 U1.35 U1.36 U1.37 U1.42 U1.43 U1.44 U1.45 U2.1 U2.4 U3.1 U3.2 U3.3 U3.4 U3.9 U3.10 U3.12 U3.14 U3.16 U12.2 U27.2 U28.2 VR4.

## Text inside footprints (layer, text, board x,y; h text height)
D1: Top Overlay "~" at -0.396,79.036 h1.52 r330; Top Overlay "~" at 1.793,79.045 h1.52 r330